# Altium PCB 供电电路.pcbdoc
Units mil, origin at the board's own origin, x right, y up, seen from the top; angles counter-clockwise.
Board outline 5122.27 x 5311.15 mil, 2 copper layers (Top Layer, Bottom Layer); 34 components, 29 nets, 120 pads, 124 vias.
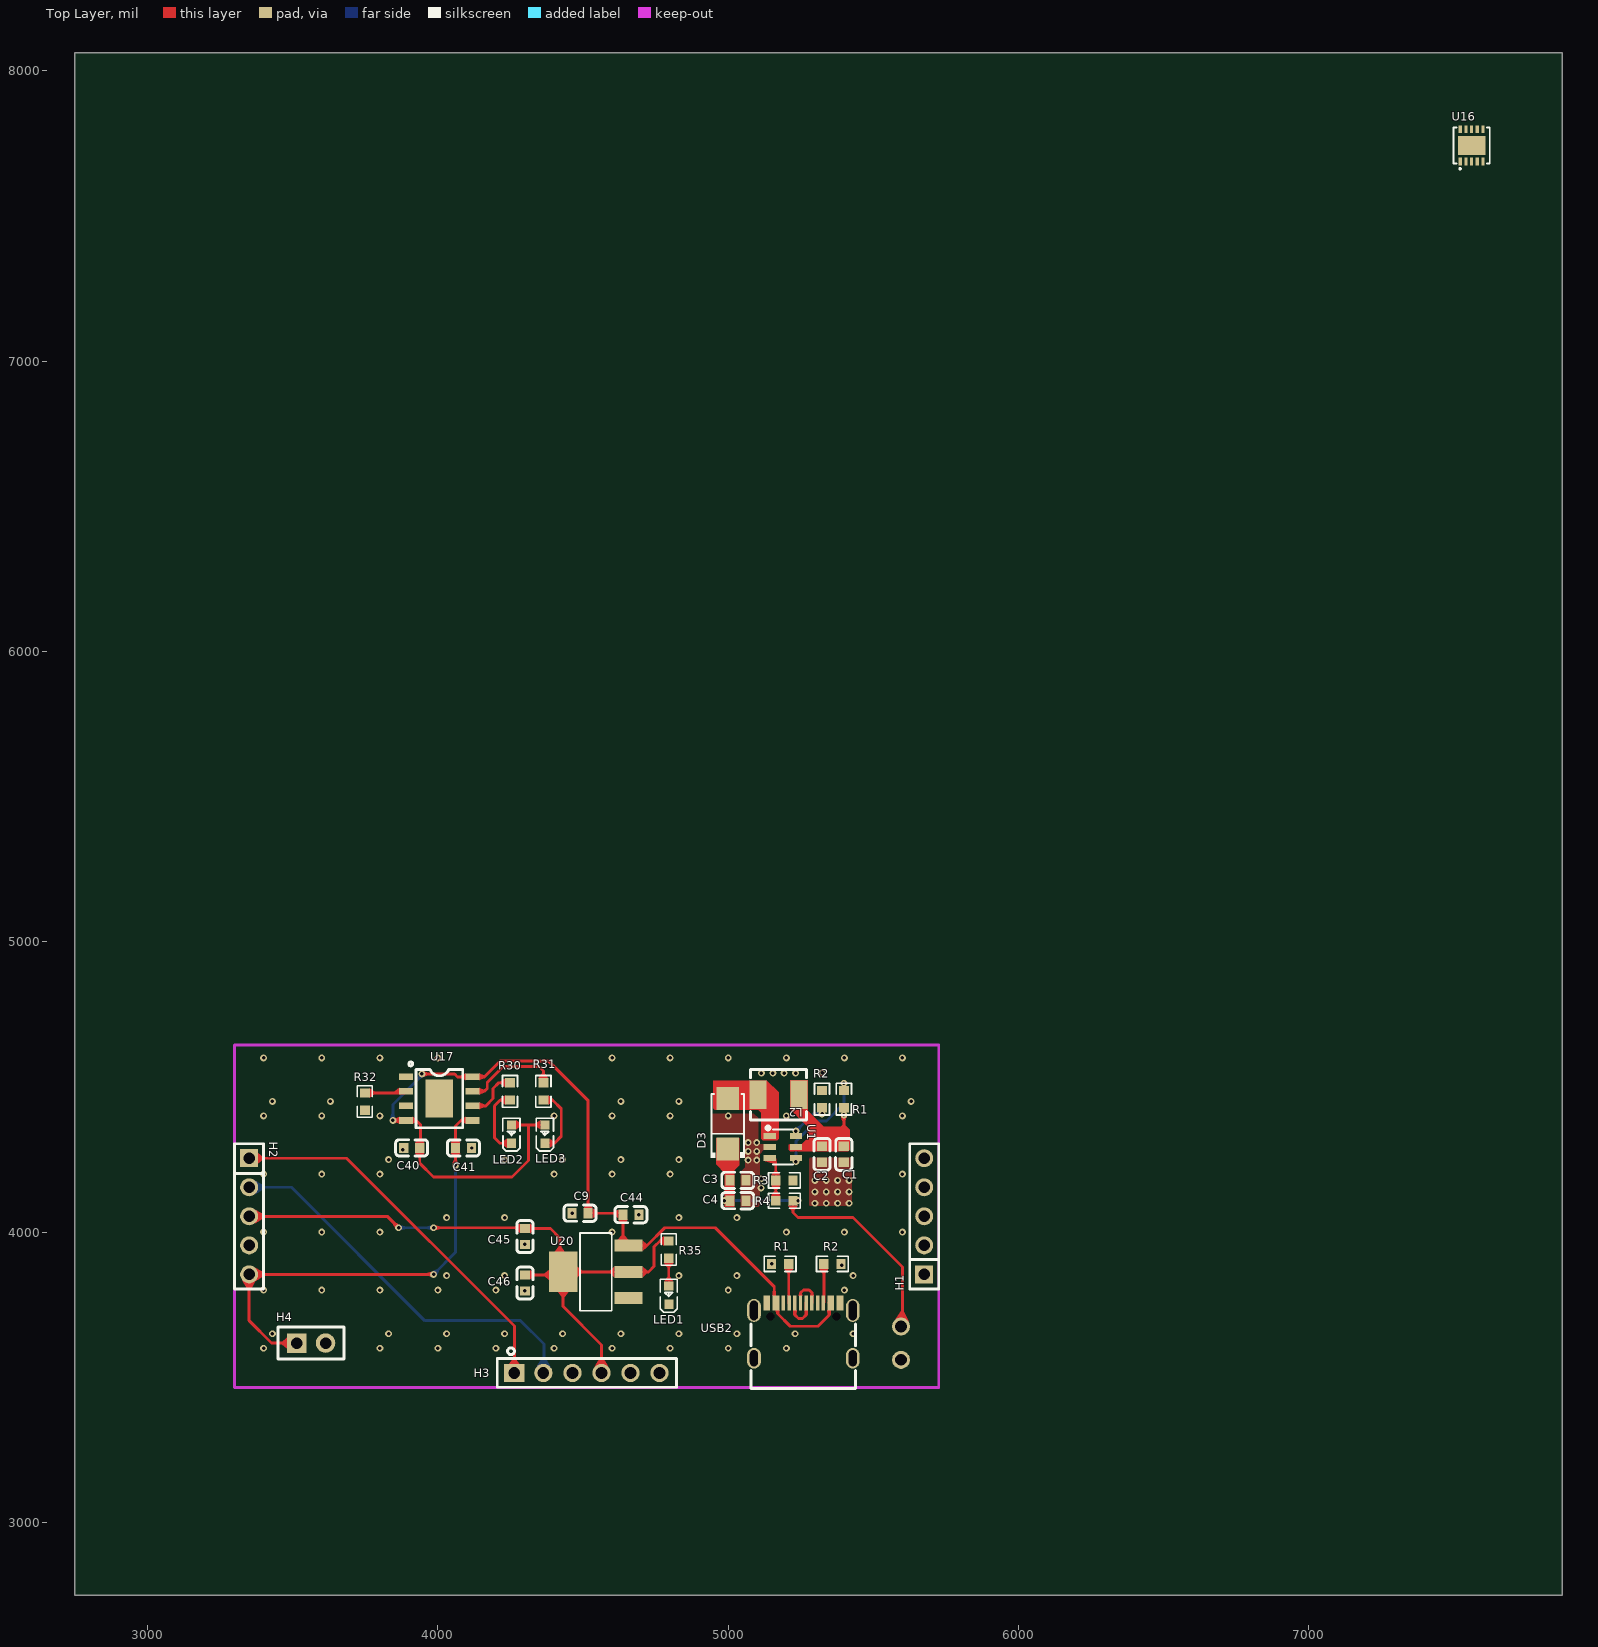
[diagram p0: Top Layer view]
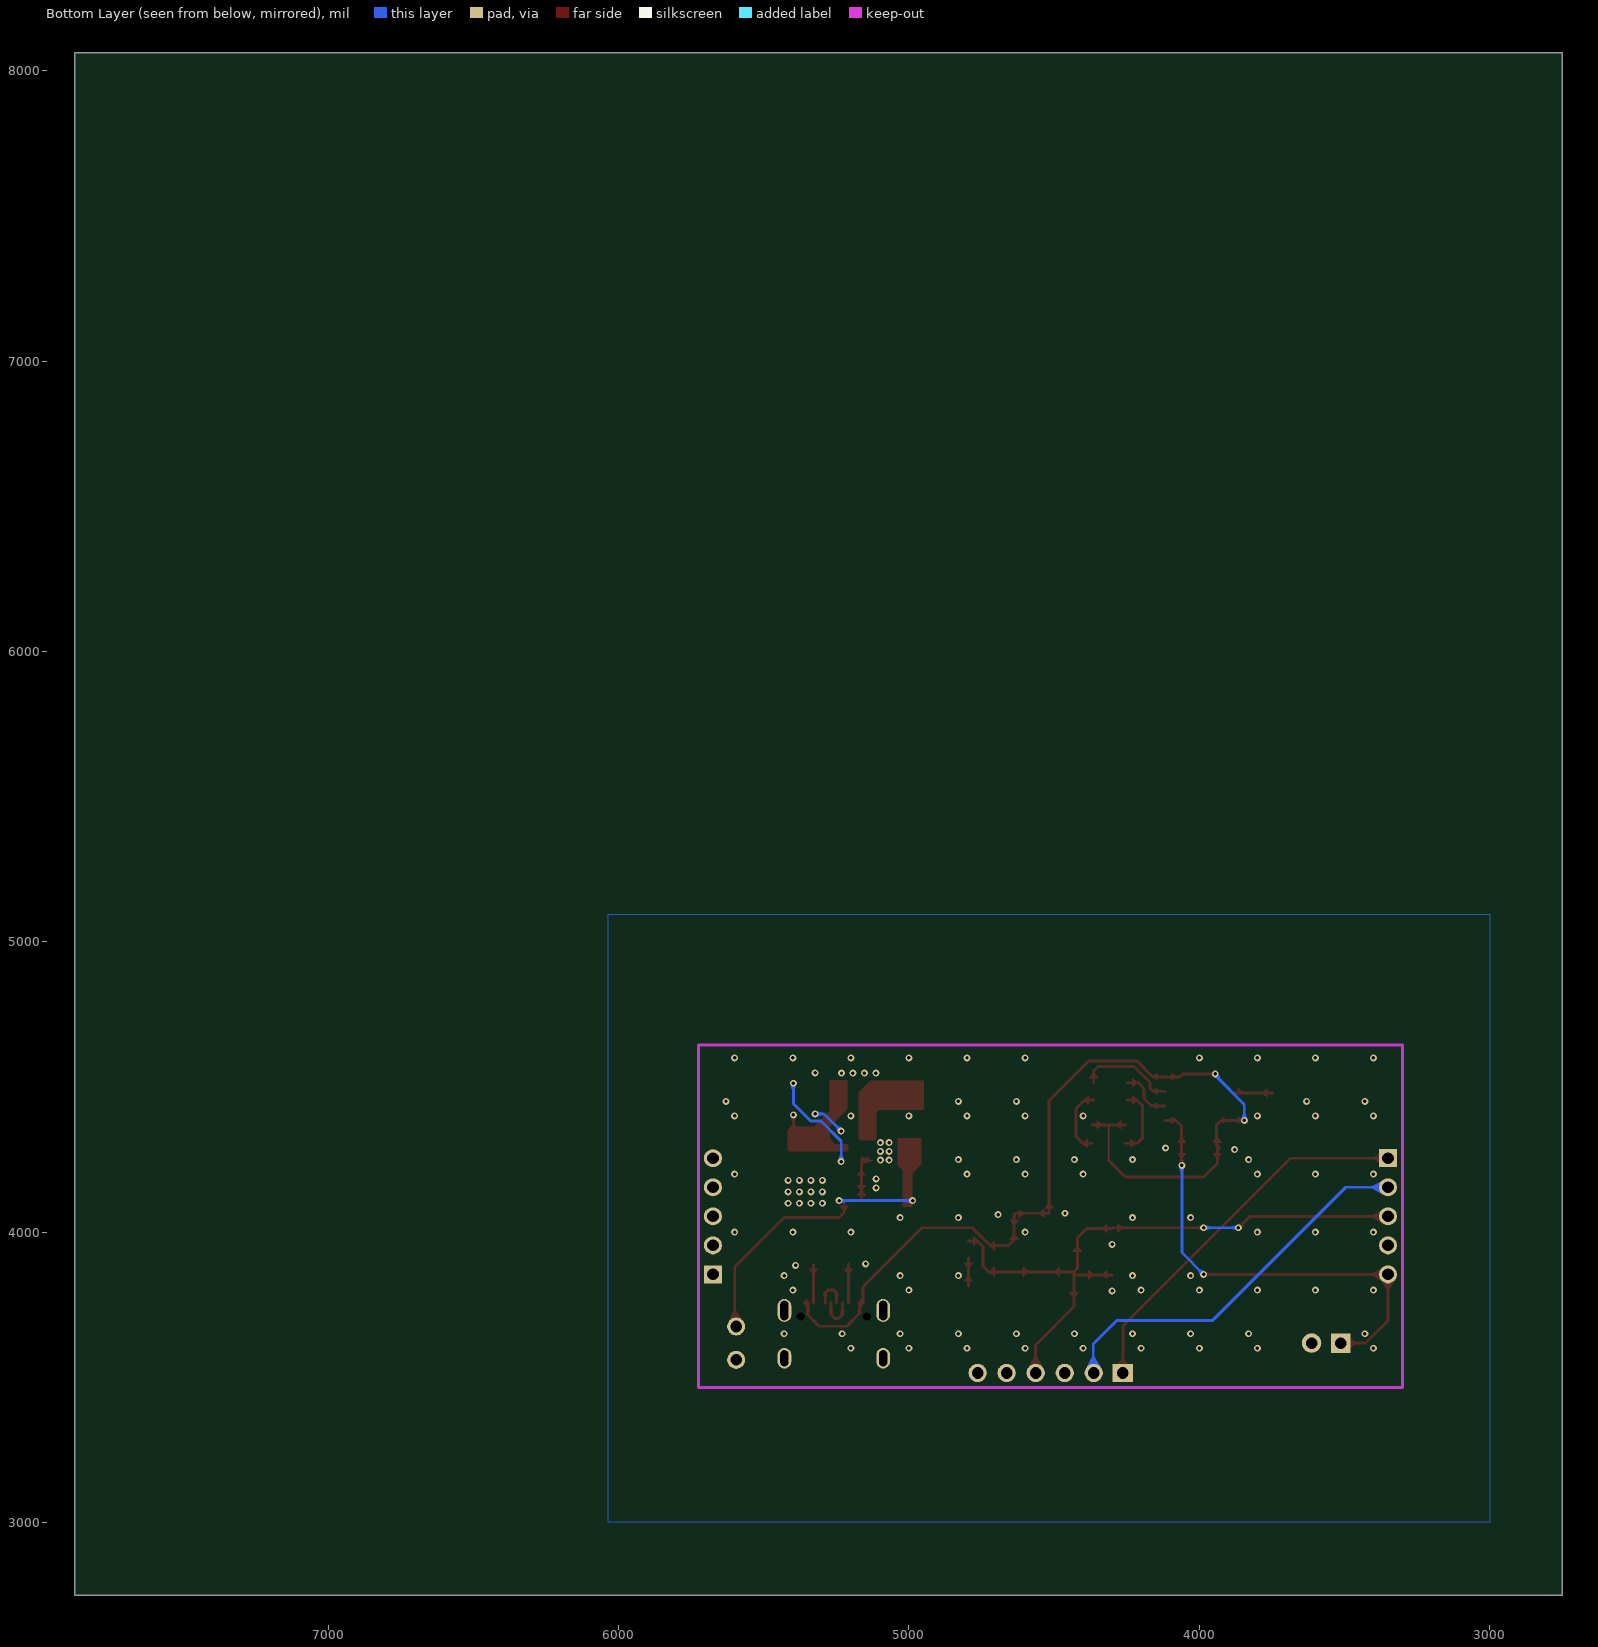
[diagram p1: Bottom Layer view, seen from below]

## Layer stack, top to bottom
Top Layer: signal copper (thickness not stored)
Dielectric: dielectric 12.6, FR-4, Dk 4.8
Bottom Layer: signal copper (thickness not stored)

## Board outline
7872.27,2750 2750,2750 2750,8061.15 7872.27,8061.15

## Components (designator, comment, footprint, x,y, rotation, side; value= is the part's Value field where it differs from the comment)
C1 "CAP_0603" C0603 5398.15,4268.17 r90 top
C2 "CAP_0603" C0603 5323.15,4268.17 r90 top
C3 "CAP_0603" C0603 5033.15,4178.17 r0 top
C4 "CAP_0603" C0603 5033.15,4108.17 r0 top
C9 "CAP_0603" C0603 4490,4065 r0 top
C40 "CAP_0603" C0603 3910,4290 r0 top
C41 "CAP_0603" C0603 4088.36,4289.72 r0 top
C44 "CAP_0603" C0603 4665,4060 r0 top
C45 "CAP_0603" C0603 4300,3985 r90 top
C46 "CAP_0603" C0603 4300,3825 r90 top
D3 "SS34_C8678" SMA_L4.3-W2.6-LS5.2-RD 4998.15,4373.17 r90 top
H1 "HDR-F_2.54_1x5P" HDR-TH_5P-P2.54-V-F 5675,4054.45 r90 top
H2 "HDR-F_2.54_1x5P" HDR-TH_5P-P2.54-V-F 3350,4054.45 r270 top
H3 "HDR-F_2.54_1x6P" HDR-TH_6P-P2.54-V-F 4513.39,3515 r0 top
H4 "HDR-F_2.54_1x2P" HDR-TH_2P-P2.54-V-F 3563.29,3617.93 r0 top
L2 "HA42-4R7MT" IND-SMD_L4.9-W4.4_MAPM0420F 5173.15,4473.17 r180 top
LED1 "LED_0603-R" LED_0603 4795,3785 r90 top
LED2 "LED_0603-R" LED_0603 4253.36,4339.72 r90 top
LED3 "LED_0603-G" LED_0603 4368.36,4339.72 r90 top
R1 "Res_0603" R0603 5178.78,3890.78 r0 top
R1 "Res_0603" R0603 5398.15,4458.17 r270 top
R2 "Res_0603" R0603 5358.78,3890.78 r180 top
R2 "Res_0603" R0603 5323.15,4458.17 r270 top
R3 "Res_0603" R0603 5193.15,4178.17 r0 top
R4 "Res_0603" R0603 5193.15,4108.17 r180 top
R30 "Res_0603" R0603 4248.36,4484.72 r270 top
R31 "Res_0603" R0603 4363.36,4484.72 r270 top
R32 "Res_0603" R0603 3748.36,4449.72 r270 top
R35 "Res_0603" R0603 4795,3940 r90 top
U1 "PW5300" SOT-23-6_L2.9-W1.6-P0.95-LS2.8-BL 5188.15,4293.17 r270 top
U16 "MP2155GQ-Z" QFN-10_L3.0-W3.0-P0.50-LS3.0-BL-EP 7560.22,7742.65 r0 top
U17 "TP4056-42-ESOP8" ESOP-8_L4.9-W3.9-P1.27-LS6.0-BL-EP 4005,4460 r270 top
U20 "AMS1117-5.0_C6187" SOT-223_L6.5-W3.5-P2.30-LS7.0-BR 4544.05,3862.87 r0 top
USB2 "KH-TYPE-C-16P-T" USB-C-SMD_KH-TYPE-C-16P 5258.78,3660.78 r0 top

## Footprints (in the part's own frame and the unit in brackets; to place one, negate y for a bottom-side part, rotate by r counter-clockwise, add the part's x,y. Pads: shape width x height; smd on the part's side, far side on the other; paste and mask are expansions set on the pad)
C0603 [mm]
  rect 0.8x0.9 smd mask+0.051: 1(-0.7,0) 2(0.7,0)
  silkscreen extent -1.41,-0.71 1.39,0.72
ESOP-8_L4.9-W3.9-P1.27-LS6.0-BL-EP [mm]
  rect 0.6x1.2 smd mask+0.051: 1(-1.905,-2.908) 2(-0.635,-2.908) 3(0.635,-2.908) 4(1.905,-2.908) 5(1.905,2.908) 6(0.635,2.908) 7(-0.635,2.908) 8(-1.905,2.908)
  rect 3.3x2.4 smd mask+0.051: 9(0,0)
  silkscreen extent -3.2,-2.67 2.55,2.05
HDR-TH_2P-P2.54-V-F [mm]
  rect 1.7x1.7 hole 1 mask+0.051: 1(-1.27,0)
  round 1.7 hole 1 mask+0.051: 2(1.27,0)
  silkscreen extent -2.88,-1.39 2.88,1.4
HDR-TH_5P-P2.54-V-F [mil]
  rect 62x62 hole 40.16 paste+0 mask+2: 1(-200,0)
  round 62 hole 40.16 paste+0 mask+2: 2(-100,0) 3(0,0) 4(100,0) 5(200,0)
  silkscreen extent -250,-50 250,50
HDR-TH_6P-P2.54-V-F [mm]
  rect 1.8x1.6 hole 1.02 paste+0 mask+0.051: 1(-6.35,0)
  round 1.6 hole 1.02 paste+0 mask+0.051: 2(-3.81,0) 3(-1.27,0) 4(1.27,0) 5(3.81,0) 6(6.35,0)
  silkscreen extent -7.85,-1.25 7.85,2.2
IND-SMD_L4.9-W4.4_MAPM0420F [mm]
  rect 1.5x2.5 smd paste+0 mask+0.051: 1(-1.78,0) 2(1.78,0)
  silkscreen extent -2.45,-2.2 2.45,2.2
LED_0603 [mil]
  rect 31.5x31.5 smd paste+0 mask+2: 1(-33.5,-0.4) 2(29.5,-0.2)
  silkscreen extent -61,-30 53,30
QFN-10_L3.0-W3.0-P0.50-LS3.0-BL-EP [mm]
  rect 0.28x0.665 smd mask+0.051: 1(-1,-1.407) 2(-0.5,-1.407) 3(0,-1.407) 4(0.5,-1.407) 5(1,-1.407) 6(1,1.407) 7(0.5,1.407) 8(0,1.407) 9(-0.5,1.407) 10(-1,1.407)
  rect 2.4x1.65 smd mask+0.051: 11(0,0)
  silkscreen extent -1.58,-2.11 1.58,1.58
R0603 [mil]
  rect 31.75x34.02 smd paste-3937.01 mask+2: 1(-29.66,0) 2(29.66,0)
  silkscreen extent -55,-26 55,26
SMA_L4.3-W2.6-LS5.2-RD [mm]
  rect 2x2 smd paste+0 mask+0.051: 1(-2.2,0) 2(2.2,0)
  silkscreen extent -2.98,-1.5 2.6,1.5
SOT-23-6_L2.9-W1.6-P0.95-LS2.8-BL [mil]
  rect 20.95x42.2 smd paste+0 mask+2: 1(-37.4,-45.24) 2(0,-45.24) 3(37.4,-45.24) 4(37.4,45.24) 5(0,45.24) 6(-37.4,45.24)
  silkscreen extent -72,-57 61,35
SOT-223_L6.5-W3.5-P2.30-LS7.0-BR [mm]
  rect 2.465x1.05 smd paste+0 mask+0.051: 1(2.857,-2.3) 2(2.857,0) 3(2.857,2.3)
  rect 2.465x3.54 smd paste+0 mask+0.051: 4(-2.857,0)
  silkscreen extent -1.4,-3.4 1.4,3.4
USB-C-SMD_KH-TYPE-C-16P [mm]
  oval 1.2x2 hole 0.7 slot 1.7 at 90 deg mask+0.051: 1(-4.32,1.765) 2(4.32,1.765)
  oval 1.2x1.8 hole 0.7 slot 1.4 at 90 deg mask+0.051: 3(-4.32,-2.415) 4(4.32,-2.415)
  rect 0.3x1.3 smd paste-100 mask+0.05: A1(-3.35,2.415) A4(-2.55,2.415) A5(-1.25,2.415) A6(-0.25,2.415) A7(0.25,2.415) A8(1.25,2.415) A9(2.55,2.415) A12(3.35,2.415) B1(3.05,2.415) B4(2.25,2.415) B5(1.75,2.415) B6(0.75,2.415) B7(-0.75,2.415) B8(-1.75,2.415) B9(-2.25,2.415) B12(-3.05,2.415)
  Multi-Layer board cut-out: -2.54,1.235 -2.575,1.387 -2.672,1.509 -2.812,1.576 -2.968,1.576 -3.108,1.509 -3.205,1.387 -3.24,1.235 -3.24,1.235 -3.205,1.083 -3.108,0.961 -2.968,0.894 -2.812,0.894 -2.672,0.961 -2.575,1.083 -2.54,1.235
  Multi-Layer board cut-out: 3.24,1.235 3.205,1.387 3.108,1.509 2.968,1.576 2.812,1.576 2.672,1.509 2.575,1.387 2.54,1.235 2.54,1.235 2.575,1.083 2.672,0.961 2.812,0.894 2.968,0.894 3.108,0.961 3.205,1.083 3.24,1.235
  silkscreen extent -4.57,-5.08 4.57,0.57

## Free pads (board coordinates)
  round 62 hole 40.16 paste+0 mask+2: 1(5595,3560) 2(5595,3675)

## Via types
v1: diameter 24.02, hole 11.97, Top Layer to Bottom Layer, 78 vias
v2: diameter 24.02, hole 12.01, Top Layer to Bottom Layer, 46 vias

## Nets (pads, with @x,y where several pads share a name; then routed paths per layer and width w, separated by ;. In a path a pad name is that pad's centre, name@x,y a point inside that pad or via, vN(x,y) a via of type N, cw(c..) or ccw(c..) an arc to the next point about the centre after c; other vN are vias at no path point)
3V3: C45.2 C46.2 H2.3 H3.4 R35.2 U20.2 U20.4 | length 2208.1
  Top Layer w10: H2.3 3825.55,4054.45 v2(3865,4015) ; v2(3985,4015) 4297.56,4015 C45.2 4387.44,4012.56 4420,3980 4420,3874.42 U20.4 ; C46.2 4421.24,3852.56 U20.4 ; H3.4 4563.39,3611.61 4431.55,3743.45 U20.4 ; R35.2 4764.66,3969.66 4745,3950 4745,3882.87 4725,3862.87 U20.2 U20.4
  Bottom Layer w10: v2(3865,4015) v2(3985,4015)
5V: C3.1 C4.1 D3.1 pad.2 R4.1 | length 956.4
  Top Layer w10: R4.1 5222.81,4067.19 5240,4050 5430,4050 5600,3880 5600,3680 pad.2
  Bottom Layer w10: v2(4986.99,4108.28) 5240.43,4108.28 v2(5240.54,4108.17)
$1N342: R1.1@5398.15,4487.83 U1.4 | length 358.4
  Bottom Layer w10: v2(5233.15,4243.17) 5233.15,4313.17 5303.15,4383.17 5338.15,4383.17 5398.15,4443.17 v2(5398.15,4512.7)
$1N485: R2.2@5323.15,4428.51 U1.6 | length 114.4
  Bottom Layer w10: v2(5233.15,4348.17) 5292.12,4407.15 v2(5323.15,4407.15)
$1N787: R3.1 R4.2 U1.3 | length 156.1
  Top Layer w10: U1.3 5163.49,4235.19 R3.1 R4.2
$1N872: D3.2 L2.2 U1.1
$2N1693: R30.1 U17.6 | length 184
  Top Layer w10: U17.6@4117.86,4434.72 4164.72,4434.72 4190,4460 4190,4495 4209.38,4514.38 R30.1
$2N1716: R31.1 U17.7 | length 339.4
  Top Layer w10: U17.7@4117.86,4484.72 4118.14,4485 4160,4485 4170,4495 4170,4515 4225,4570 4348.36,4570 4363.36,4555 R31.1
$2N1722: LED2.1 R30.2 | length 238.1
  Top Layer w10: R30.2@4248.3,4455 4215,4455 4195,4435 4195,4325 4213.78,4306.22 LED2.1
$2N1775: LED3.1 R31.2 | length 235.2
  Top Layer w10: R31.2 4394.94,4455.06 4425,4425 4425,4330 4401.22,4306.22 LED3.1
$2N1906: R32.1 U17.2 | length 142.7
  Top Layer w10: R32.1 3883.52,4479.38 U17.2@3888.86,4484.72
$2N2495: LED1.2 R35.1 | length 95.9
  Top Layer w10: R35.1 4795.2,3910.14 LED1.2
+5V: C9.2 C40.2 C44.1 LED2.2 LED3.2 U17.4 U17.8 U20.3 USB2.A4 USB2.A9 USB2.B4 USB2.B9 | length 3358
  Top Layer w10: v2(3845,4384.72) 3888.86,4384.72 3925.28,4384.72 3940,4370 3940,4298.8 C40.2@3930.92,4289.72 ; C40.2 3937.56,4237.44 3985,4190 4255,4190 4311.84,4246.84 4311.84,4369.22 ; v2(3945,4545) 3945.28,4544.72 4057.86,4544.72 4067.86,4534.72 4117.86,4534.72 4160,4534.72 4215.28,4590 4380,4590 4517.56,4452.44 C9.2 4632.44,4065 C44.1 4637.44,3972.53 U20.3 4720,3953.42 4781.58,4015 4955,4015 5158.39,3811.61 USB2.A4 USB2.B9@5169.95,3755.86 ; LED2.2 4311.84,4369.22 ; LED3.2 4311.84,4369.22 ; USB2.B9@5169.95,3757.04 USB2.B9@5169.95,3755.86 ; USB2.B9 USB2.B9@5169.95,3755.86 ; USB2.B4@5347.11,3757.03 5347.93,3756.21 USB2.B4@5347.93,3755.85 ; USB2.B4 USB2.B4@5347.93,3755.85 ; USB2.A9 USB2.B4@5347.93,3755.85 ; USB2.B9@5169.95,3755.86 5169.95,3719.61 5213.78,3675.78 5308.78,3675.78 5347.93,3714.93 USB2.B4@5347.93,3755.85
  Bottom Layer w10: v2(3845,4384.72) 3845,4440 3945,4540 v2(3945,4545)
BAT: C41.1 H2.5 H4.1 U17.5 | length 1597.1
  Top Layer w10: H4.1 3427.07,3617.93 3350,3695 H2.5 v2(3985,3854.45) ; v2(4060,4230) 4060.8,4230.8 C41.1 4060.8,4365.52 4080,4384.72 U17.5@4117.86,4384.72
  Bottom Layer w10: v2(3985,3854.45) 4060,3929.45 v2(4060,4230)
CC1: R1.2@5208.44,3890.78 USB2.A5 | length 135.4
  Top Layer w10: R1.2@5208.44,3890.78 5208.44,3756.99 USB2.A5
CC2: R2.2@5329.12,3890.78 USB2.B5 | length 133.4
  Top Layer w10: USB2.B5 5329.12,3757.3 R2.2@5329.12,3888.66
CLK: H1.5
CS: H1.4
D+: USB2.A6 USB2.B6 | length 117.9
  Top Layer w10: USB2.A6 5248.94,3790.94 5258.78,3800.78 5278.78,3800.78 5288.31,3791.25 USB2.B6
D-: USB2.A7 USB2.B7 | length 133
  Top Layer w10: USB2.B7@5229,3757.04 5229,3715.56 5241.71,3702.85 5255.86,3702.85 5268.37,3715.37 USB2.A7@5268.37,3757.04
DOUT: H1.3
GND: C1.1 C2.1 C3.2 C4.2 C9.1 C40.1 C41.2 C44.2 C45.1 C46.1 H1.2 H2.4 H3.3 H4.2 LED1.1 pad.1 R1.1@5149.12,3890.78 R2.1 R3.2 R32.2 U1.2 U17.1 U17.3 U20.1 USB2.1 USB2.2 USB2.3 USB2.4 USB2.A1 USB2.A12 USB2.B1 USB2.B12
  other v1: 3400,3600 3800,3600 4000,3600 4200,3600 4400,3600 4600,3600 4800,3600 5000,3600 5200,3600 3430,3650 3830,3650 4030,3650 4230,3650 4430,3650 4630,3650 4830,3650 5030,3650 5230,3650 5430,3650 3400,3800 3600,3800 3800,3800 4000,3800 4200,3800 5000,3800 5400,3800 4030,3850 4230,3850 4830,3850 5030,3850 5430,3850 3400,4000 3600,4000 3800,4000 4600,4000 5200,4000 5400,4000 5600,4000 4030,4050 4230,4050 4830,4050 5030,4050 3400,4200 3600,4200 3800,4200 4400,4200 4600,4200 4800,4200 5600,4200 3830,4250 4230,4250 4430,4250 4630,4250 4830,4250 3400,4400 3600,4400 3800,4400 4400,4400 4600,4400 4800,4400 5000,4400 5200,4400 5600,4400 3430,4450 3630,4450 4630,4450 4830,4450 5630,4450 3400,4600 3600,4600 3800,4600 4000,4600 4600,4600 4800,4600 5000,4600 5200,4600 5400,4600 5600,4600
  other v2: 4300,3797.44 5390.28,3885.37 5149.12,3890.78 4300,3957.44 4692.56,4060 4462.44,4065 5298.15,4099.43 5337.52,4099.43 5376.89,4099.43 5416.26,4099.43 5298.15,4138.8 5337.52,4138.8 5376.89,4138.8 5416.26,4138.8 5113.15,4152.17 5298.15,4178.17 5337.52,4178.17 5376.89,4178.17 5416.26,4178.17 5113.15,4183.17 5068.15,4248.17 5098.15,4248.17 5068.15,4278.17 5098.15,4278.17 3878.5,4284.14 4115.92,4289.72 5068.15,4308.17 5098.15,4308.17 5114.09,4547.23 5153.46,4547.23 5192.83,4547.23 5232.2,4547.23 5323.15,4548.17
KEY3: H2.1 H3.1 | length 1314.3
  Top Layer w10: H2.1 3685.55,4254.45 4263.39,3676.61 H3.1
KEY4: H2.2 H3.2 | length 1339.1
  Bottom Layer w10: H2.2 3495.55,4154.45 3955,3695 4285,3695 4365,3615 4365,3516.61 H3.2
RX: H3.6
TX: H3.5
VCC: H1.1
VIN: C1.2 C2.2 L2.1 R1.2@5398.15,4428.51 U1.5 | length 45.5
  Top Layer w10: 5398.15,4358.17 v2(5398.15,4403.64)
"": U16.1 U16.2 U16.3 U16.4 U16.5 U16.6 U16.7 U16.8 U16.9 U16.10 U16.11 U17.9 USB2.A8 USB2.B8

## Polygon pours and split planes (outlines as drawn)
GND on Top Layer (hatched 45Degree grid 30 track 10, remove dead copper, pour order 0): 3230,3250 5915,3250 5915,4830 3230,4830
GND on Bottom Layer (solid, remove dead copper, pour order 1): 3000,3000 6035,3000 6035,5095 3000,5095

## Keep-outs
Board Outline Layer:
  lines w10 net "": 3300,3465 5725,3465 5725,4645 3300,4645 3300,3465

## Other copper
Top Layer:
  region net VIN: 5213.15,4523.17 5213.15,4423.17 5273.15,4363.17 5273.15,4323.17 5253.15,4303.17 5211.3,4303.17 5208.24,4300.12 5208.24,4283.07 5213.15,4278.17 5413.15,4278.17 5418.15,4283.17 5418.15,4353.17 5408.15,4363.17 5328.15,4363.17 5273.15,4418.17 5273.15,4523.17
  region net VIN: 5408.15,4363.17 5402.92,4368.4 5393.15,4368.4 5387.92,4363.17
  region net 5V: 4958.15,4323.17 5038.15,4323.17 5038.15,4229.61 5021.51,4212.97 5021.51,4088.53 5021.15,4088.17 4988.15,4088.17 4988.15,4203.17 4958.15,4233.17
  region net $1N872: 4948.15,4521.45 5133.15,4521.45 5173.15,4481.45 5173.15,4321.45 5168.15,4316.45 5118.15,4316.45 5113.15,4321.45 5113.15,4411.45 5103.15,4421.45 4953.15,4421.45 4948.15,4426.45
  region net 5V: 5621.25,3691.49 5605,3726.76 5595,3728.4 5575.36,3698.99
  region net $2N1906: 3851.88,4484.38 3851.88,4474.38 3866.88,4473.19 3866.88,4496.81
  region net +5V: 3851.88,4379.72 3866.88,4373.19 3866.88,4396.81 3851.88,4389.72
  region net +5V: 3925.28,4389.72 3914.12,4396.81 3914.12,4373.19 3925.28,4379.72
  region net BAT: 4080.88,4379.72 4095.88,4373.19 4095.88,4396.81 4080.88,4389.72
  region net $2N1693: 4158.12,4439.72 4143.12,4446.81 4143.12,4423.19 4158.12,4429.72
  region net $2N1716: 4158.12,4480 4158.12,4490 4143.12,4496.81 4143.12,4473.19
  region net +5V: 4080.88,4529.72 4095.88,4523.19 4095.88,4546.81 4080.88,4539.72
  region net +5V: 4158.12,4539.72 4143.12,4546.81 4143.12,4523.19 4158.12,4529.72
  region net +5V: 5169.95,3750.86 5169.95,3760.86 5164.3,3773.36 5164.3,3738.36
  region net +5V: 5163.39,3796.45 5153.39,3796.45 5152.49,3781.45 5164.3,3781.45
  region net +5V: 5158.39,3750.86 5164.3,3738.36 5164.3,3773.36 5158.39,3760.86
  region net +5V: 5174.95,3719.61 5176.11,3730.27 5164.3,3730.27 5164.95,3719.61
  region net D-: 5234,3715.56 5235.16,3730.27 5223.35,3730.27 5224,3715.56
  region net D+: 5243.94,3790.94 5243.04,3781.45 5254.85,3781.45 5253.94,3790.94
  region net D-: 5263.37,3715.37 5273.37,3715.37 5274.53,3730.27 5262.72,3730.27
  region net D+: 5293.31,3791.25 5283.31,3791.25 5282.41,3781.45 5294.22,3781.45
  region net +5V: 5342.93,3715.26 5352.93,3715.26 5353.27,3730.26 5341.46,3730.26
  region net +5V: 5359.18,3760.85 5353.27,3773.35 5353.27,3738.35 5359.18,3750.85
  region net +5V: 5347.93,3760.85 5347.93,3750.85 5353.28,3738.35 5353.28,3773.35
  region net CC1: 5213.44,3858.77 5224.32,3873.77 5192.57,3873.77 5203.44,3858.77
  region net CC2: 5334.12,3858.77 5345,3873.77 5313.25,3873.77 5324.12,3858.77
  region net +5V: 3942.56,4257.28 3953.31,4272.28 3921.81,4272.28 3932.56,4257.28
  region net +5V: 3945,4322.72 3935,4322.72 3922.5,4307.72 3953.31,4307.72
  region net $2N1722: 4216.35,4450 4231.35,4439.19 4231.35,4470.94 4216.35,4460
  region net $2N1693: 4216.35,4519.38 4216.35,4509.38 4231.35,4498.51 4231.35,4530.26
  region net $2N1775: 4394.94,4460.06 4380.37,4470.94 4380.37,4439.19 4394.94,4450.06
  region net $2N1716: 4358.36,4545.26 4346.35,4530.26 4380.37,4530.26 4368.36,4545.26
  region net BAT: 4065.8,4257 4076.55,4272 4045.05,4272 4055.8,4257
  region net BAT: 4065.8,4322.44 4055.8,4322.44 4045.05,4307.44 4076.55,4307.44
  region net $2N1906: 3780.37,4484.38 3765.37,4495.26 3765.37,4463.51 3780.37,4474.38
  region net 3V3: 4720.08,3867.87 4705.08,3880.37 4705.08,3845.37 4720.08,3857.87
  region net 3V3: 4593.03,3867.87 4593.03,3857.87 4608.03,3845.37 4608.03,3880.37
  region net +5V: 4642.44,3989.09 4632.44,3989.09 4619.94,3974.09 4654.94,3974.09
  region net +5V: 4720,3958.42 4705.08,3970.92 4705.08,3935.92 4720,3948.42
  region net 3V3: 4425,3947.56 4415,3947.56 4402.5,3932.56 4437.5,3932.56
  region net 3V3: 4436.55,3778.19 4449.05,3793.19 4414.05,3793.19 4426.55,3778.19
  region net 3V3: 4368.03,3847.56 4383.03,3835.06 4383.03,3870.06 4368.03,3857.56
  region net 3V3: 4495.08,3867.87 4480.08,3880.37 4480.08,3845.37 4495.08,3857.87
  region net +5V: 4522.56,4097.72 4512.56,4097.72 4501.81,4082.72 4533.31,4082.72
  region net +5V: 4548.31,4070 4533.31,4082.5 4533.31,4047.5 4548.31,4060
  region net 3V3: 4764.66,3974.66 4764.66,3964.66 4777.99,3953.78 4777.99,3985.54
  region net $2N2495: 4800.2,3879.46 4812.01,3894.46 4777.99,3894.46 4790.2,3879.46
  region net $2N2495: 4800.2,3845.25 4790.2,3845.25 4779.45,3830.25 4810.95,3830.25
  region net +5V: 4642.44,4027.28 4653.19,4042.28 4621.69,4042.28 4632.44,4027.28
  region net +5V: 4606.69,4070 4606.69,4060 4621.69,4047.5 4621.69,4077.72
  region net 3V3: 4267.28,4020 4267.28,4010 4282.28,3997.5 4282.28,4028.31
  region net 3V3: 4332.72,4017.56 4317.72,4028.31 4317.72,3996.81 4332.72,4007.56
  region net 3V3: 4332.72,3847.56 4332.72,3857.56 4317.72,3868.31 4317.72,3836.81
  region net BAT: 3370.5,3831.2 3402.7,3849.45 3402.7,3859.45 3370.5,3877.7
  region net BAT: 3326.75,3833.94 3345,3801.75 3355,3801.75 3373.25,3833.94
  region net 3V3: 3370.5,4031.2 3402.7,4049.45 3402.7,4059.45 3370.5,4077.7
  region net KEY3: 3396,4259.45 3381,4271.95 3381,4236.95 3396,4249.45
  region net 3V3: 4587.01,3535.83 4568.39,3568.54 4558.39,3568.54 4539.76,3535.83
  region net KEY3: 4268.39,3561.5 4258.39,3561.5 4245.89,3546.5 4280.89,3546.5
  region net $2N1722: 4223.01,4311.22 4223.01,4301.22 4238.01,4290.47 4238.01,4321.97
  region net +5V: 4284.31,4374.22 4269.31,4384.97 4269.31,4353.47 4284.31,4364.22
  region net $2N1775: 4399.51,4301.22 4399.51,4311.22 4384.51,4321.97 4384.51,4290.47
  region net +5V: 4337.81,4374.22 4337.81,4364.22 4352.81,4353.47 4352.81,4384.97
  region net BAT: 3464.83,3622.93 3464.83,3612.93 3479.83,3600.43 3479.83,3635.43
  region net $1N787: 5168.49,4210.18 5158.49,4210.18 5147.61,4195.18 5179.36,4195.18
  region net $1N787: 5168.49,4146.16 5179.36,4161.16 5147.61,4161.16 5158.49,4146.16
  region net $1N787: 5168.49,4140.18 5158.49,4140.18 5147.61,4125.18 5179.36,4125.18
  region net 5V: 5227.81,4076.16 5238.68,4091.16 5206.93,4091.16 5217.81,4076.16
  region net $1N787: 5167.02,4238.73 5164.01,4259.42 5121.81,4245.3 5156.92,4234.69
  region net +5V: 3852.94,4375.71 3865.41,4379.72 3865.41,4389.72 3852.94,4393.73
  region net +5V: 3952.73,4535.81 3965.3,4539.72 3965.53,4549.72 3953.15,4553.82
  region net 3V3: 3865.75,4026.98 3854.1,4032.97 3847.03,4025.9 3853.02,4014.25
  region net 3V3: 3992.94,4005.99 4005.41,4010 4005.41,4020 3992.94,4024.01
  region net BAT: 3977.06,3863.45 3964.59,3859.45 3964.59,3849.45 3977.06,3845.44
  region net BAT: 4069.52,4237.32 4065.8,4250.07 4055.8,4250.74 4051.54,4238.53
  region net VIN: 5389.14,4395.7 5393.15,4383.23 5403.15,4383.23 5407.15,4395.7
Bottom Layer:
  region net KEY4: 3370.5,4131.2 3402.7,4149.45 3402.7,4159.45 3370.5,4177.7
  region net KEY4: 4388.04,3534.59 4370,3568.27 4360,3568.79 4340.86,3537.02
  region net +5V: 3854.01,4392.66 3850,4405.13 3840,4405.13 3835.99,4392.66
  region net +5V: 3933.33,4542.19 3928.54,4530.61 3937.79,4525.72 3949.25,4533.77
  region net 3V3: 3872.94,4005.99 3885.41,4010 3885.41,4020 3872.94,4024.01
  region net 3V3: 3977.06,4024.01 3964.59,4020 3964.59,4010 3977.06,4005.99
  region net BAT: 3996.98,3853.7 4002.97,3865.35 3995.9,3872.42 3984.25,3866.43
  region net BAT: 4050.99,4222.06 4055,4209.59 4065,4209.59 4069.01,4222.06
  region net 5V: 4994.94,4099.27 5007.41,4103.28 5007.41,4113.28 4994.94,4117.28
  region net $1N485: 5315.2,4416.15 5302.73,4412.15 5302.73,4402.15 5315.2,4398.14
  region net $1N342: 5389.14,4504.76 5393.15,4492.29 5403.15,4492.29 5407.15,4504.76
  region net $1N342: 5242.15,4251.11 5238.15,4263.58 5228.15,4263.58 5224.14,4251.11
  region net 5V: 5232.68,4117.25 5220.17,4113.28 5220.08,4103.28 5232.52,4099.23
  region net $1N485: 5245.13,4347.42 5251.12,4359.07 5244.05,4366.14 5232.4,4360.15